# Altium PCB Keyfinder.PcbDoc
Units mil, origin at the board's own origin, x right, y up, seen from the top; angles counter-clockwise.
Board outline 1813.03 x 1308.03 mil, 2 copper layers (Top Layer, Bottom Layer); 24 components, 22 nets, 100 pads, 3 vias.
Unrouted connection lines stored in the file: 1.
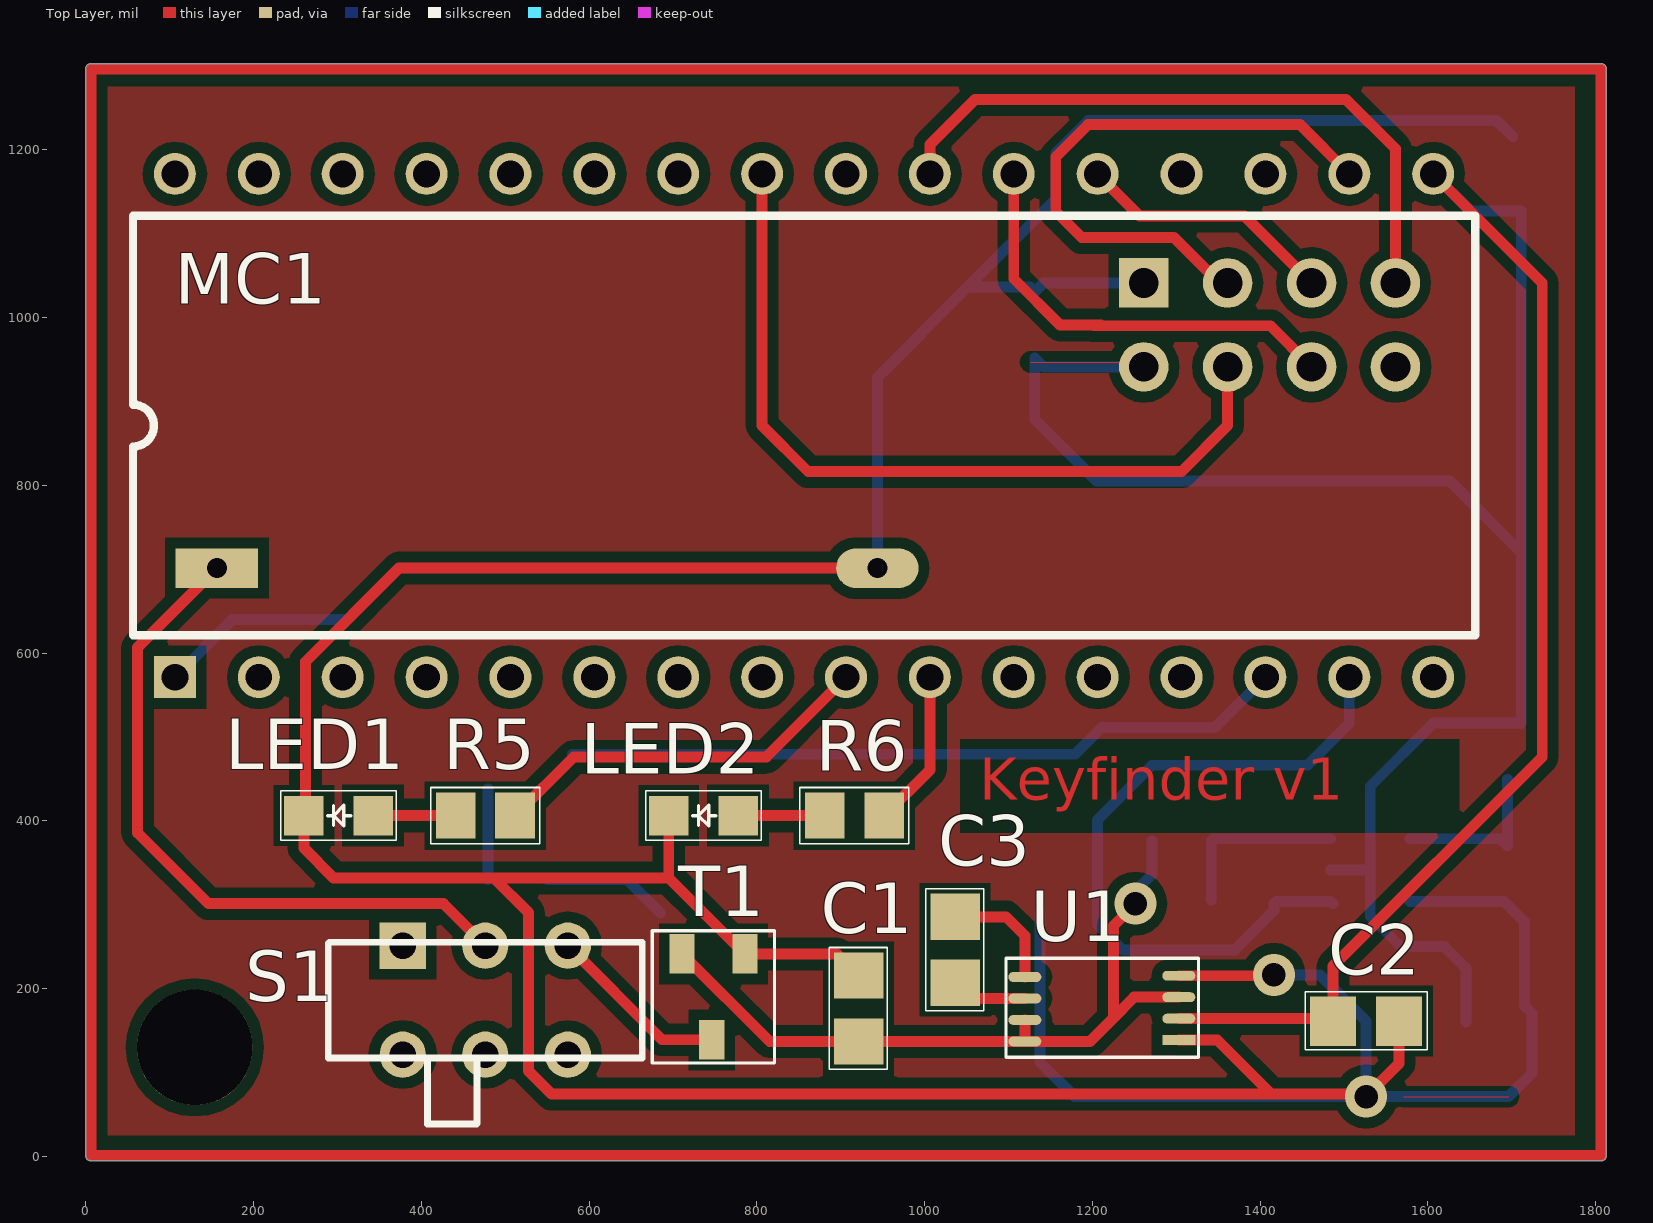
[diagram p0: Top Layer view]
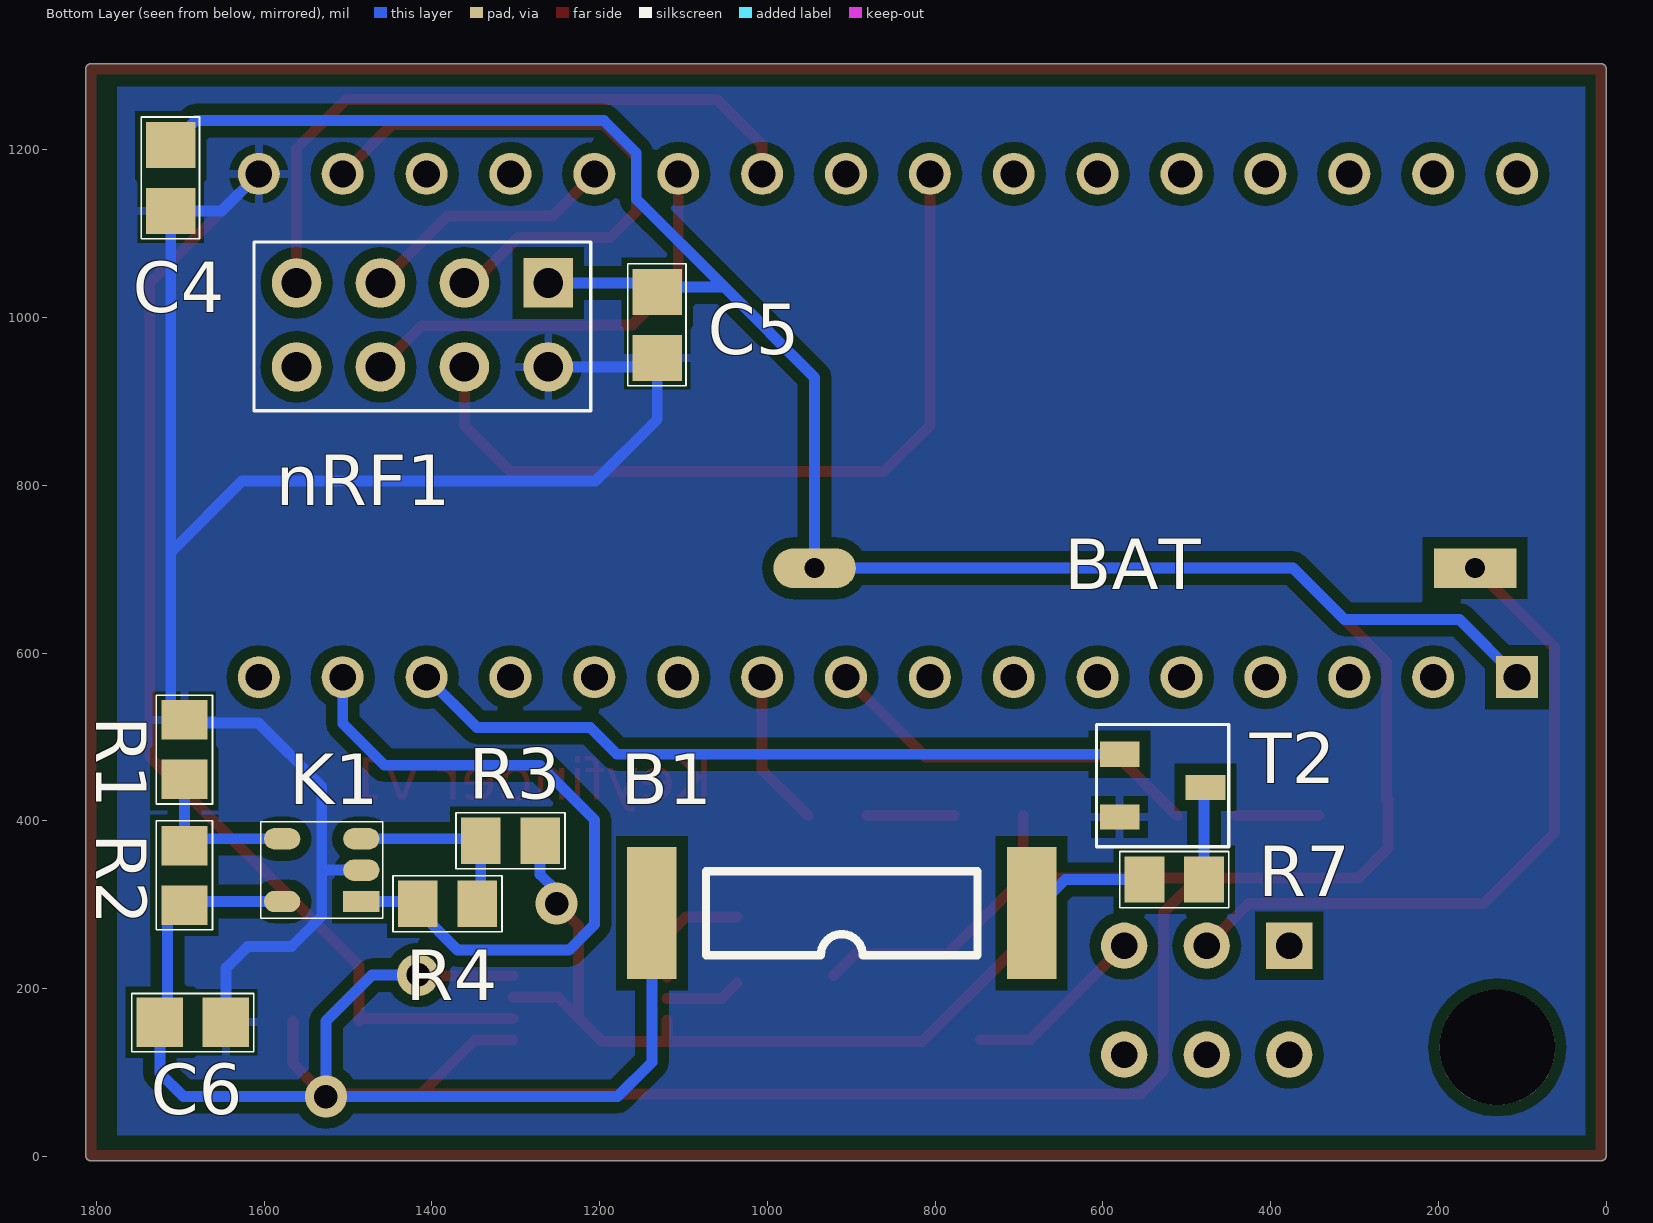
[diagram p1: Bottom Layer view, seen from below]
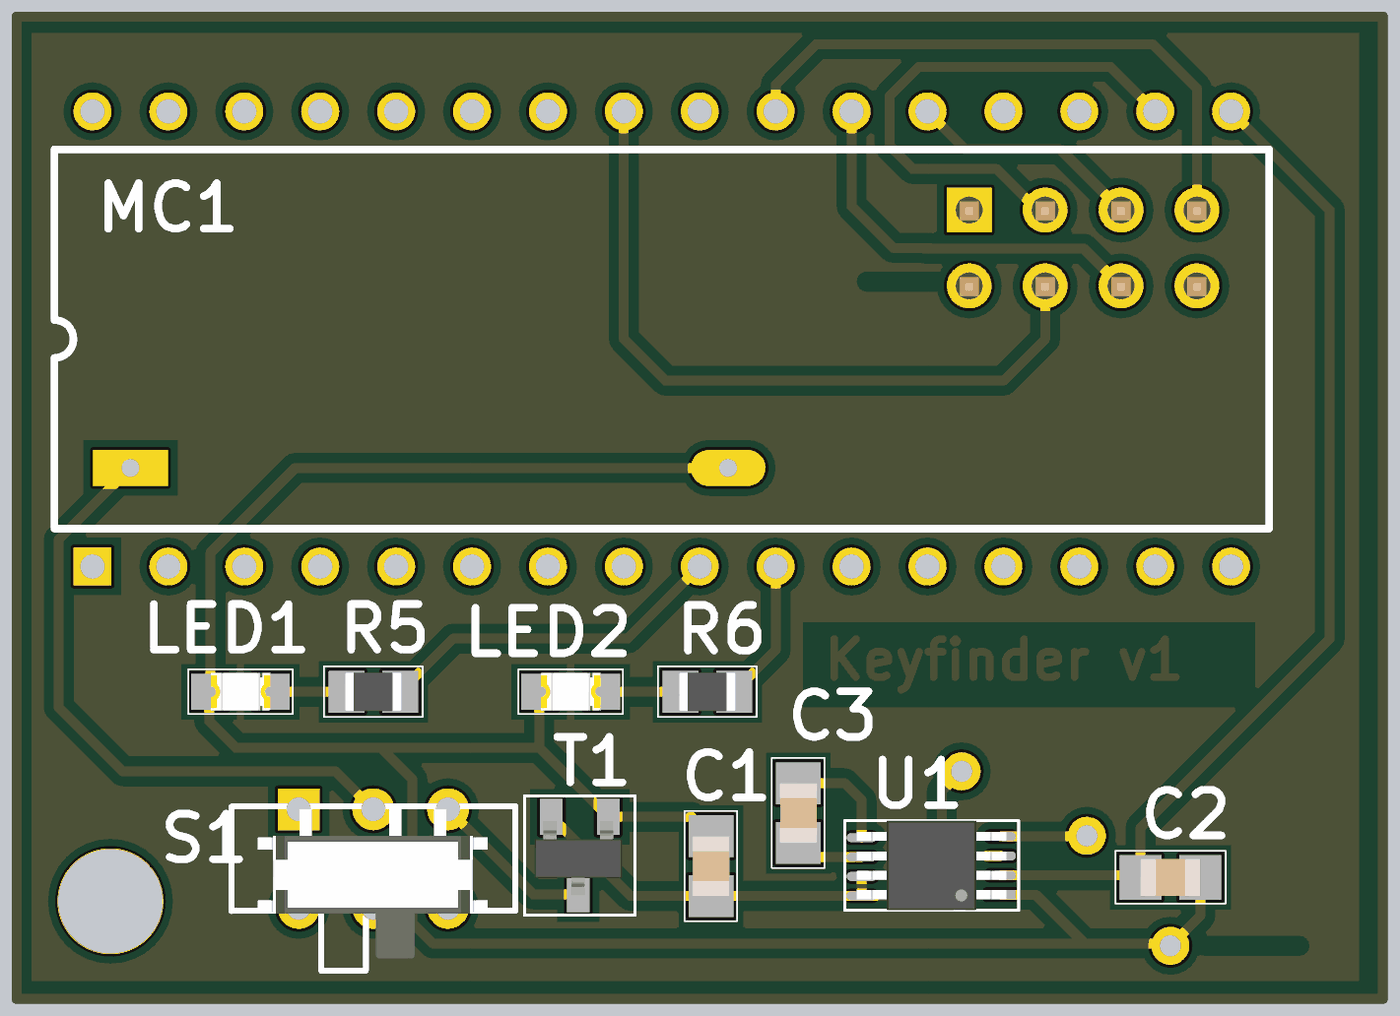
[diagram p2: 3D render of the assembled board from above, using the file's embedded part models]
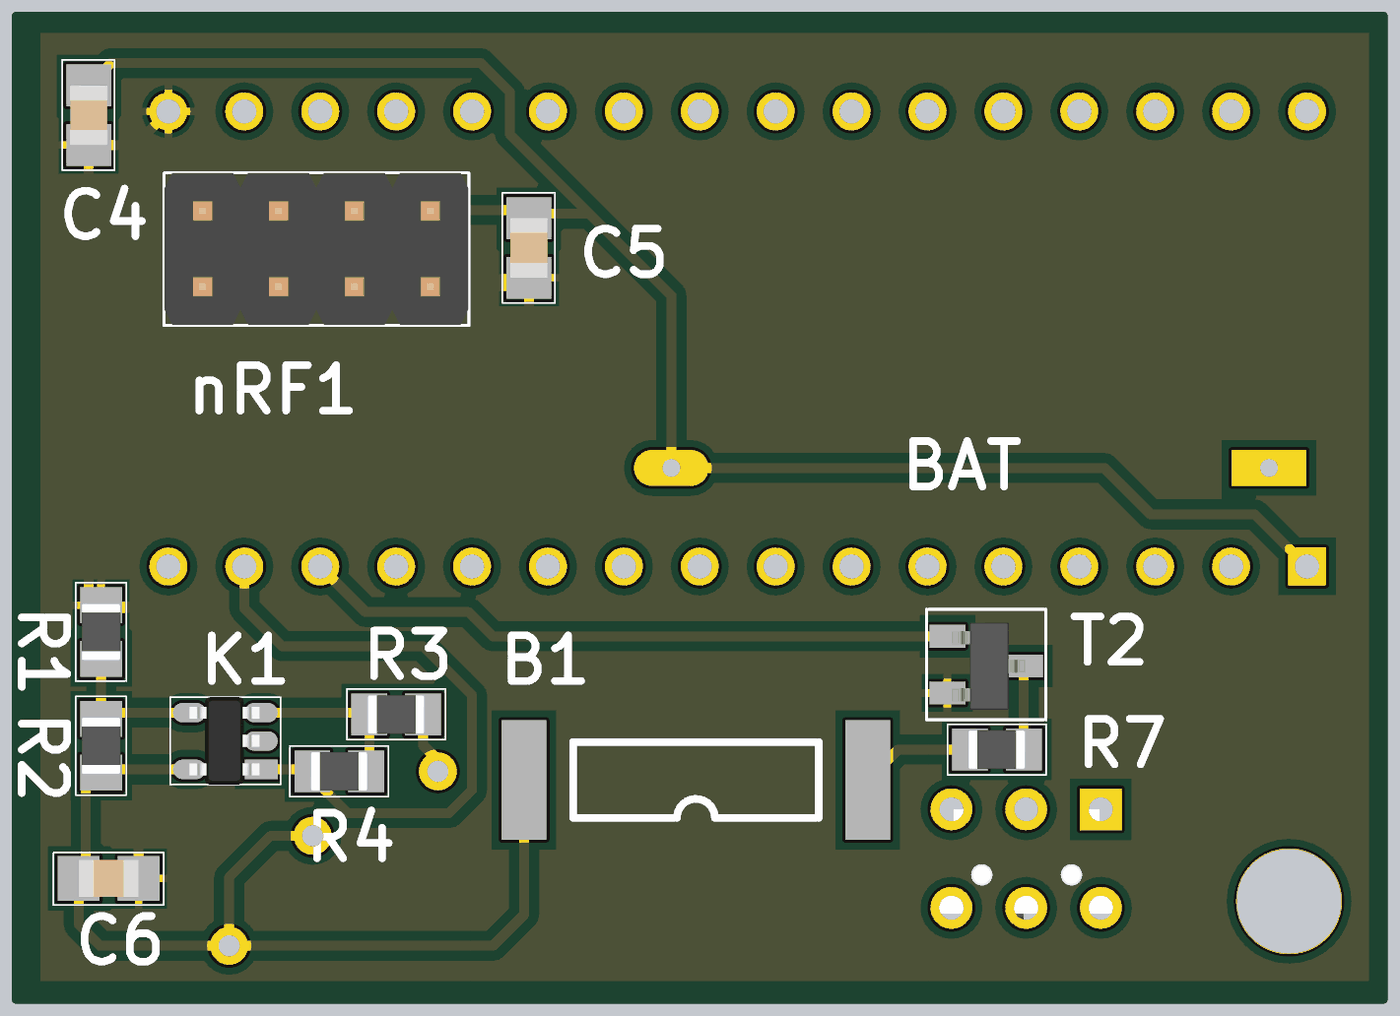
[diagram p3: 3D render of the assembled board from below, using the file's embedded part models]

## Layer stack, top to bottom
Top Solder: solder mask 0.4, Solder Resist, Dk 3.5
Top Layer: signal copper 1.4
Dielectric 1: dielectric 12.6, FR-4, Dk 4.8
Bottom Layer: signal copper 1.4
Bottom Solder: solder mask 0.4, Solder Resist, Dk 3.5

## Board outline
6.33,-5.24 cw(c6.33,1.27) -0.19,1.27 -0.19,1296.27 cw(c6.33,1296.27) 6.33,1302.79 1806.33,1302.79 cw(c1806.33,1296.27) 1812.84,1296.27 1812.84,1.27 cw(c1806.33,1.27) 1806.33,-5.24

## Design rules (kind name [scope] priority, off if disabled: settings)
Clearance [All] p1: gap=13
PolygonConnect [All] p1: connectstyle=Relief reliefconductorwidth=10 reliefentries=4 polygonreliefangle="90 Angle" airgapwidth=10
RoomDefinition Keyfinder_MCU [InComponentClass('Keyfinder_MCU')] p1: confinementstyle=ConfineIn formatcopy=TRUE lockcomponents=FALSE outline 6.33,1.27 1806.33,1.27 1806.33,1296.27 6.33,1296.27
RoomDefinition Keyfinder_RF [InComponentClass('Keyfinder_RF')] p2: confinementstyle=ConfineIn formatcopy=TRUE lockcomponents=FALSE outline 6.33,1.27 1806.33,1.27 1806.33,1296.27 6.33,1296.27
RoomDefinition Keyfinder_Alert [InComponentClass('Keyfinder_Alert')] p3: confinementstyle=ConfineIn formatcopy=TRUE lockcomponents=FALSE outline 6.33,1.27 1806.33,1.27 1806.33,1296.27 6.33,1296.27
RoomDefinition Keyfinder_Power [InComponentClass('Keyfinder_Power')] p4: confinementstyle=ConfineIn formatcopy=TRUE lockcomponents=FALSE outline 6.33,1.27 1806.33,1.27 1806.33,1296.27 6.33,1296.27
RoutingVias [All] p1: holewidth=28 width=50 viastyle="Through Hole" minholewidth=28 minwidth=50 maxholewidth=28 maxwidth=50
SolderMaskExpansion [All] p1: expansion=4
UnpouredPolygon [All] p1: allowunpoured=FALSE
Width [All] p1: maxlimit=13 minlimit=13 preferedwidth=13
29 further rules are at their usual default settings.

## Classes and differential pairs
component class Keyfinder_MCU: C4 MC1
component class Keyfinder_RF: C5 nRF1
component class Keyfinder_Power: BAT C1 C2 C3 S1 T1 U1
component class Keyfinder_Alert: B1 C6 K1 LED1 LED2 R1 R2 R3 R4 R5 R6 R7 T2 T5 T6

## Components (designator, comment, footprint, x,y, rotation, side; value= is the part's Value field where it differs from the comment)
B1 "Buzzer" piezo_ele 685,290 r0 bottom
BAT "CR2032" Bat_case 156.33,701.27 r0 bottom
C1 "10u" 0805_C 921.33,176.27 r270 top
C2 "10u" 0805_C 1526.33,161.27 r180 top
C3 "1u" 0805_C 1036.33,246.27 r270 top
C4 "100n" 0805_C 1711.33,1166.27 r270 bottom
C5 "10u" 0805_C 1131.33,991.27 r270 bottom
C6 "100n" 0805_C 1685,160 r180 bottom
K1 "MCP6561R" SOT23-5 1531.33,341.27 r0 bottom
LED1 "Value" 0805_LED 301.33,406.27 r180 top
LED2 "Value" 0805_LED 736.33,406.27 r180 top
MC1 "TinyK20" DIP32 106.33,571.27 r90 top
nRF1 "nRF24L01+" CON_THT_2x4P_RM2.54_Stiftl 1411.33,991.27 r0 bottom
R1 "100k" 0805_R 1695,485 r270 bottom
R2 "220k" 0805_R 1695,335 r270 bottom
R3 "100k" 0805_R 1306.33,376.27 r180 bottom
R4 "3.3M" 0805_R 1381.33,301.27 r180 bottom
R5 "1k" 0805_R 476.33,406.27 r180 top
R6 "1k" 0805_R 916.33,406.27 r180 top
R7 "1k" 0805_R 515,330 r0 bottom
S1 "SW SPDT" SW_MCLSS22 476.33,186.27 r0 top
T1 "BSS84" SOT23-3 746.33,186.27 r180 top
T2 "BSS84" SOT23-3 525,440 r270 bottom
U1 "MCP1252-33" MSOP8 1211.33,176.27 r90 top

## Footprints (in the part's own frame and the unit in brackets; to place one, negate y for a bottom-side part, rotate by r counter-clockwise, add the part's x,y. Pads: shape width x height; smd on the part's side, far side on the other; paste and mask are expansions set on the pad)
0805_C [mm] "Chip Capasitor - 0805 Medium"
  rect 1.4x1.5 smd: 1(-1,0) 2(1,0)
  silkscreen extent -1.85,-0.89 1.84,0.87, body extent -1,-0.62 1,0.62, height 0.59
0805_LED [mm]
  rect 1.2x1.2 smd: 1(-1.05,0) 2(1.05,0)
  silkscreen extent -1.75,-0.75 1.75,0.75, body extent -1,-0.62 1,0.62, height 0.39
0805_R [mm] "Chip Resistor - 0805 Normal"
  rect 1.2x1.4 smd: 1(-0.9,0) 2(0.9,0)
  silkscreen extent -1.65,-0.85 1.65,0.85, body extent -0.95,-0.65 0.95,0.65, height 0.63
Bat_case [mm]
  rect 2.5x1.2 hole 0.6: 1(0,0)
  oval 2.5x1.2 hole 0.6: 2(20,0)
CON_THT_2x4P_RM2.54_Stiftl [mm] "Connector; Header; 2x4Position"
  rect 1.5x1.5 hole 0.9: 1(-3.81,-1.27)
  round 1.5 hole 0.9: 2(-3.81,1.27) 3(-1.27,-1.27) 4(-1.27,1.27) 5(1.27,-1.27) 6(1.27,1.27) 7(3.81,-1.27) 8(3.81,1.27)
  silkscreen extent -5.1,-2.51 5.1,2.6, body extent -5.08,-2.51 5.08,2.57, height 8.57
DIP32 [mil]
  rect 50x50 hole 32: 1(0,0)
  round 50 hole 32: 2(0,-100) 3(0,-200) 4(0,-300) 5(0,-400) 6(0,-500) 7(0,-600) 8(0,-700) 9(0,-800) 10(0,-900) 11(0,-1000) 12(0,-1100) 13(0,-1200) 14(0,-1300) 15(0,-1400) 16(0,-1500) 17(600,-1500) 18(600,-1400) 19(600,-1300) 20(600,-1200) 21(600,-1100) 22(600,-1000) 23(600,-900) 24(600,-800) 25(600,-700) 26(600,-600) 27(600,-500) 28(600,-400) 29(600,-300) 30(600,-200) 31(600,-100) 32(600,0)
  silkscreen extent 50,-1550 550,50
MSOP8 [mm]
  rect 0.3x1 smd: 1(-0.956,-2.332)
  oval 0.3x1 smd: 2(-0.306,-2.332) 3(0.344,-2.332) 4(0.994,-2.332) 5(0.956,2.332) 6(0.306,2.332) 7(-0.344,2.332) 8(-0.994,2.332)
  silkscreen extent -1.47,-2.93 1.52,2.9, body extent -1.48,-2.51 1.52,2.49, height 0.92
piezo_ele [mm]
  rect 1.5x4 smd: 1(0,0) 2(11.5,0)
  silkscreen extent 1.64,-1.27 9.86,1.27
SOT23-3 [mm]
  rect 0.76x1.2 smd: 1(-1,-1.4) 2(0.9,-1.4) 3(0,1.2)
  silkscreen extent -1.9,-2.1 1.8,1.9, body extent -1.46,-1.25 1.46,1.23, height 1
SOT23-5 [mm] "SOT23, 5-Leads, Body 2.9x1.6mm, Pitch 0.95mm, Lead Span 2.8mm, IPC Medium Density"
  rect 1.1x0.65 smd: 1(-1.2,0.95)
  oval 1.1x0.65 smd: 2(-1.2,0) 3(-1.2,-0.95) 4(1.2,-0.95) 5(1.2,0.95)
  silkscreen extent -1.85,-1.46 1.85,1.46, body extent -1.14,-1.46 1.2,1.46, height 1
SW_MCLSS22 [mm]
  rect 1.4x1.4 hole 0.8: 1(-2.5,1.65)
  round 1.4 hole 0.8: 2(0,1.65) 3(2.5,1.65) 4(-2.5,-1.65) 5(0,-1.65) 6(2.5,-1.65)
  silkscreen extent -4.75,-3.75 4.75,1.75, body extent -3.87,-3.34 3.83,1.66, height 1.4

## Part data
B1: library part SPEAKER
BAT: library part BATTERY
C1 C2 C3 C4 C5 C6: library part C?, "Normaler Kondensator"
K1: library part OPAMP
LED1 LED2: library part LED
nRF1: library part Bluefruit
R1 R2 R3 R4 R5 R6 R7: library part R?, "Normaler Widerstand"
T1: library part "MOSFET-P 1G,2D,3S (Diode)", "MOSFET-P 1G,2D,3S (Diode)"
T2: library part "MOSFET-P 1D,2G,3S", "MOSFET-P 1D,2G,3S"
U1: library part VOLTREG

## Free pads (board coordinates)
  round 137.8 hole 137.8: 0(130,130)

## Via types
v1: diameter 50, hole 28, Top Layer to Bottom Layer, 3 vias

## Nets (pads, with @x,y where several pads share a name; then routed paths per layer and width w, separated by ;. In a path a pad name is that pad's centre, name@x,y a point inside that pad or via, vN(x,y) a via of type N, cw(c..) or ccw(c..) an arc to the next point about the centre after c; other vN are vias at no path point)
3V3: C2.2 C4.2 C5.2 C6.2 K1.2 MC1.17 nRF1.2 R1.1 T2.2 U1.2 | length 3815.1
  Top Layer w0: 1126.33,946.9 nRF1.2@1255.7,946.9 ; 1571.33,71.27 1696.33,71.27
  Top Layer w13: nRF1.2@1255.7,946.9 nRF1.2 ; U1.2 C2.2@1484,164.22 ; C2.2 1486.96,226.9 1736.33,476.27 1736.33,1041.27 MC1.17
  Bottom Layer w13: nRF1.2 1141.96,941.27 C5.2 1131.33,878.67 1205,805 1626.33,805 1711.33,720 ; K1.2 1531.33,341.27 ; MC1.17 1650.7,1126.9 C4.2 1711.33,720 ; C6.2 1645.63,224.37 1620,250 1567.6,250 1531.33,286.27 1531.33,341.27 ; 1531.33,341.27 1531.33,441.27 1606.76,516.71 1711.33,516.71 1711.33,720
ALERT_BUZZER: MC1.14 T2.1 | length 864.3
  Bottom Layer w13: T2.1 1179.37,479.37 1211.27,511.27 1346.33,511.27 MC1.14
ALERT_LED: MC1.10 R6.1 | length 187.6
  Top Layer w13: R6.1 1006.33,460.84 MC1.10
BAT: C1.2 R3.2 T1.2 U1.3 U1.7 U1.8 | length 913
  Top Layer w13: T1.2 815.38,136.9 C1.2 ; C1.2@921.56,137.14 U1.8 ; U1.7 U1.8 ; v1(1251.33,301.27) 1225.03,274.97 1225.03,164.97 ; U1.3 1249.87,189.82 1225.03,164.97 ; U1.8 1197.19,137.14 1225.03,164.97
  Bottom Layer w13: v1(1251.33,301.27) 1251.33,316.27 1270.89,335.84 R3.2
BAT_KON: K1.1 MC1.15 R4.1 | length 846.4
  Bottom Layer w13: R4.1 1416.76,293.38 1369.65,246.27 1236.33,246.27 1206.33,276.27 1206.33,401.27 1271.33,466.27 1456.33,466.27 1506.33,516.27 MC1.15 ; R4.1@1419.36,303.87 K1.1 K1.1@1486.76,301.19
BAT_KON_LED: MC1.9 R5.1 | length 462.9
  Top Layer w13: R5.1 581.76,476.27 811.33,476.27 MC1.9
GND: B1.2 BAT.2 C1.1 C2.1 C4.1 C5.1 C6.1 K1.5 LED1.2 LED2.2 MC1.1 nRF1.1 R2.2 T1.1 U1.1 U1.4 | length 6961.6
  Top Layer w13: LED2.2 694.99,332.1 ; C1.1 895.58,241.39 T1.1 694.99,332.1 ; BAT.2 373.39,701.27 261.83,589.7 261.83,424.43 259.99,426.27 LED1.2 259.99,367.61 295.5,332.1 486.33,332.1 ; U1.1 1348.96,138.63 1413.35,74.25 ; U1.4 1420.46,215.41 v1@1421.33,216.27 ; v1@1523.35,74.25 1413.35,74.25 ; v1(1526.33,71.27) 1565.7,110.64 C2.1 ; 486.33,332.1 527.69,290.73 527.69,101.82 555.26,74.25 1413.35,74.25 ; 486.33,332.1 694.99,332.1
  Bottom Layer w13: MC1.1 175.06,640 312.12,640 373.39,701.27 BAT.2 943.73,928.67 1051.33,1036.27 ; C5.1@1125.7,1036.27 1051.33,1036.27 ; C5.1 1141.96,1041.27 nRF1.1 ; B1.2 1137.76,112.24 1178.73,71.27 v1(1526.33,71.27) ; v1(1416.33,216.27) 1471.33,216.27 1526.33,161.27 v1(1526.33,71.27) ; K1.5 R2.2@1690.7,303.87 ; R2.2 1715,279.57 1715,180 1724.37,170.63 C6.1 1724.37,99.37 1696.27,71.27 v1(1526.33,71.27) ; C4.1@1701.2,1215.77 1681.97,1235 1195.06,1235 1156.33,1196.27 1156.33,1141.27 1051.33,1036.27
NetB1_1: B1.1 R7.2 | length 151.1
  Bottom Layer w13: R7.2 645,330 B1.1
NetBAT_1: BAT.1 S1.2 | length 824.9
  Top Layer w13: BAT.1 61.83,606.77 61.83,385.77 146.33,301.27 426.29,301.27 S1.2
NetC3_1: C3.1 U1.5 | length 141.7
  Top Layer w13: C3.1 1096.96,285.64 1119.53,263.06 U1.5
NetC3_2: C3.2 U1.6 | length 90.9
  Top Layer w13: C3.2 1054.91,188.32 U1.6
NetK1_3: K1.3 R3.1 R4.2 | length 214.2
  Bottom Layer w13: R4.2@1341.76,305.4 R3.1 1344.16,378.67 K1.3
NetK1_4: K1.4 R1.2 R2.1 | length 199
  Bottom Layer w13: K1.4 1686.76,378.67 R2.1 R1.2
NetLED1_1: LED1.1 R5.2 | length 98.2
  Top Layer w13: LED1.1 R5.2
NetLED2_1: LED2.1 R6.2 | length 103.2
  Top Layer w13: LED2.1 R6.2
NetR7_1: R7.1 T2.3 | length 108.2
  Bottom Layer w13: R7.1 T2.3@479.57,438.19
NetS1_3: S1.3 T1.3 | length 218.1
  Top Layer w13: S1.3 686.96,139.03 T1.3
NRF_CE: MC1.18 nRF1.3 | length 695.6
  Top Layer w13: nRF1.3 1351.39,1041.27 1297.39,1095.27 1187.33,1095.27 1156.33,1126.27 1156.33,1191.27 1195.06,1230 1447.6,1230 MC1.18
NRF_CSN: MC1.25 nRF1.4 | length 970.6
  Top Layer w13: MC1.25 806.33,871.27 861.33,816.27 1306.33,816.27 1361.33,871.27 nRF1.4
NRF_MISO: MC1.23 nRF1.7 | length 796.6
  Top Layer w13: MC1.23 1006.33,1206.27 1060.06,1260 1502.6,1260 1561.33,1201.27 nRF1.7
NRF_MOSI: MC1.22 nRF1.6 | length 531.2
  Top Layer w13: MC1.22 1106.33,1046.27 1161.33,991.27 1210.35,991.27 ; 1202.3,990.3 1412.3,990.3 nRF1.6
NRF_SCK: MC1.21 nRF1.5 | length 308.8
  Top Layer w13: MC1.21 1256.33,1121.27 1381.33,1121.27 nRF1.5
pads on no net: MC1.2 MC1.3 MC1.4 MC1.5 MC1.6 MC1.7 MC1.8 MC1.11 MC1.12 MC1.13 MC1.16 MC1.19 MC1.20 MC1.24 MC1.26 MC1.27 MC1.28 MC1.29 MC1.30 MC1.31 MC1.32 nRF1.8 S1.1 S1.4 S1.5 S1.6
copper on no net: | length 6190
  Top Layer w13: 6.33,1.27 1806.33,1.27 1806.33,1296.27 6.33,1296.27 6.33,1.27

## Polygon pours and split planes (outlines as drawn)
no net on Top Layer "Top Layer-No Net" (solid, pour order 4): 25,25 1775,25 1775,1275 25,1275
3V3 on Bottom Layer "Top Layer-No Net" (solid, pour order 3): 25,25 1775,25 1775,1275 25,1275

## Other copper
Top Layer:
  text "Keyfinder v1" at 1065,425 h50